# EAGLE board leddriverv3 (EAGLE 9.2.2)
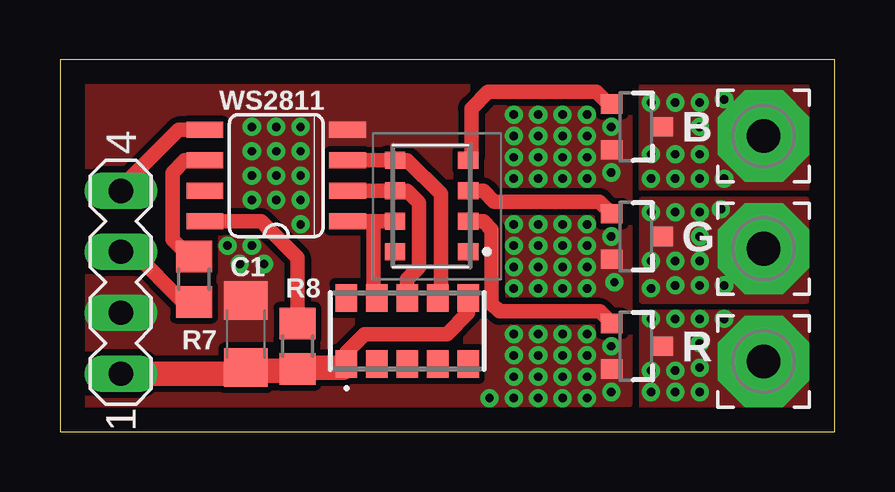
[diagram p0: board, top side]
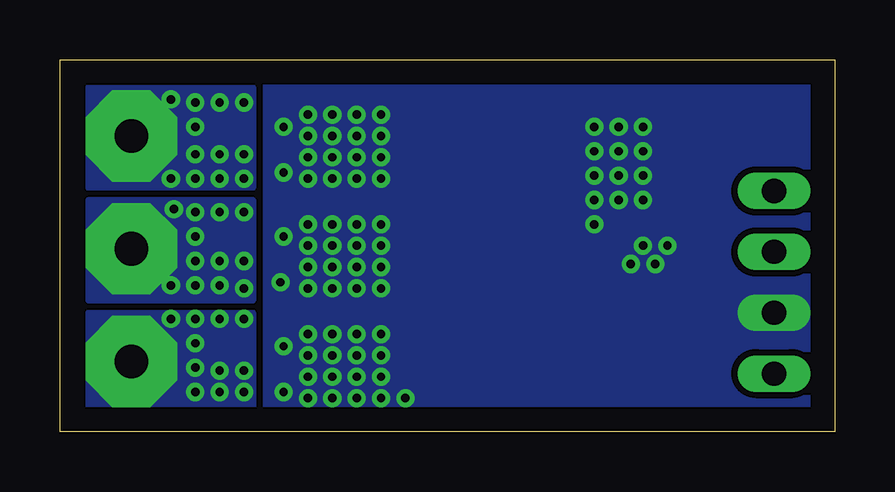
[diagram p1: board, bottom side, seen from below]

Size 32.31 x 15.48 mm. Coordinates in mm from the lower left corner, seen from the top.
Outline: 0,0 32.31,0 32.31,15.48 0,15.48 0,0
Copper layers (1*16): Top 0.035mm / dielectric 1.5mm / Bottom 0.035mm
Design rules "default *": minimum track width 6mil, minimum drill 0.35mm, track to track 6mil, track to pad 6mil, pad to pad 6mil, via to via 6mil, smd to smd 6mil, copper to edge 40mil, drill to drill 6mil, minimum pad ring 10mil, minimum via ring 8mil, stop-mask expansion 4mil, vias tented up to drill 100mil, thermal gap 10mil

## Footprints (pad centres in the part's own frame; a part is rotated, then mirrored left to right if it is on the bottom)
C1206 = smd 1.6 x 1.8: 1 -1.4,0; 2 1.4,0
SO08-SKINNYPADS = smd 0.66 x 1.524: 1 -1.905,-2.973; 2 -0.635,-2.973; 3 0.635,-2.973; 4 1.905,-2.973; 5 1.905,2.973; 6 0.635,2.973; 7 -0.635,2.973; 8 -1.905,2.973
3,81/1,4 = drill 1.397 pad 3.81 octagon: 1 0,0
R0805 = smd 1.3 x 1.5: 1 -0.95,0; 2 0.95,0
YC324JK07100RL = smd 0.71 x 0.85: 1 -1.905,-1.525; 2 -0.635,-1.525; 3 0.635,-1.525; 4 1.905,-1.525; 5 -1.905,1.525; 6 -0.635,1.525; 7 0.635,1.525; 8 1.905,1.525
YC358T = smd 0.9 x 1.15: 1 -2.54,-1.375; 2 -1.27,-1.375; 3 0,-1.375; 4 1.27,-1.375; 5 2.54,-1.375; 6 2.54,1.375; 7 1.27,1.375; 8 0,1.375; 9 -1.27,1.375; 10 -2.54,1.375
MA04-1 = drill 1.016 long: 1 -3.81,0; 2 -1.27,0; 3 1.27,0; 4 3.81,0
SOT23-3 = smd 0.8 x 0.9: 1 -0.95,-1; 2 0.95,-1; 3 0,1.1

## Placement (x,y rotation side)
C1  0.1uF  [C1206]  7.75,4.06 270 top
IC1  WS2811-SOP8  [SO08-SKINNYPADS]  9.02,10.67 90 top
PAD1  [3,81/1,4]  29.34,2.92 0 top
PAD2  [3,81/1,4]  29.34,7.62 0 top
PAD3  [3,81/1,4]  29.34,12.32 0 top
R7  2.7k  [R0805]  9.91,3.56 270 top
R8  33  [R0805]  5.59,6.35 270 top
RN1  YC324-JK-07100RL  [YC324JK07100RL]  15.49,9.4 90 top
RN2  YC358TJK-0710KL  [YC358T]  14.48,4.19 0 top
SV1  [MA04-1]  2.54,6.22 90 top
TB  5.8A/30V/35mΩ  [SOT23-3]  24,12.7 270 top
TG  5.8A/30V/35mΩ  [SOT23-3]  24,8.13 270 top
TR  5.8A/30V/35mΩ  [SOT23-3]  24,3.56 270 top

## Library data of the parts
C1 = rcl; SPICEPREFIX: C
IC1 = adafruit_wsled
PAD1-PAD3 = wirepad
R7 R8 = rcl; SPICEPREFIX: R
RN1 = SamacSys_Parts; DESCRIPTION: Resistor Networks & Arrays; HEIGHT: 0.6mm; MANUFACTURER_NAME: YAGEO (PHYCOMP); MANUFACTURER_PART_NUMBER: YC324-JK-07100RL; MOUSER_PART_NUMBER: 603-YC324-JK-07100RL; MOUSER_PRICE-STOCK: https://www.mouser.com/Search/Refine.aspx?Keyword=603-YC324-JK-07100RL
RN2 = SamacSys_Parts; DESCRIPTION: Resistor Networks & Arrays 10K 5% CONVEX SQUARE 8X1225; HEIGHT: mm; MANUFACTURER_NAME: YAGEO (PHYCOMP); MANUFACTURER_PART_NUMBER: YC358TJK-0710KL; MOUSER_PART_NUMBER: 603-YC358TJK-0710KL; MOUSER_PRICE-STOCK: https://www.mouser.com/Search/Refine.aspx?Keyword=603-YC358TJK-0710KL
SV1 = con-lstb; OC_FARNELL: unknown; OC_NEWARK: unknown
TB TG TR = SparkFun-DiscreteSemi; PROD_ID: TRANS-12988

## Nets
+12V: C1.2 R7.2 RN2.1 RN2.6 SV1.1
B: IC1.3 RN1.8 RN2.7
BT: RN1.4 TB.1
DIN: R8.2 SV1.3
DOUT: IC1.5 SV1.4
G: IC1.2 RN1.7 RN2.8
GND: C1.1 IC1.4 SV1.2 TB.2 TG.2 TR.2
GT: RN1.3 TG.1
N$1: IC1.6 R8.1
NEG_B: PAD3.1 TB.3
NEG_G: PAD2.1 TG.3
NEG_R: PAD1.1 TR.3
R: IC1.1 RN1.6 RN2.9
RT: RN1.2 TR.1
VDD: IC1.8 R7.1

## Tracks (layer width: path | path; a pad name or v marks a point on that pad's centre or on a via)
+12V
  Top 0.61: RN2.6 17.02,4.95 16.13,4.06 12.7,4.06 11.94,3.3 RN2.1 11.94,2.79 11.81,2.67
  Top 1.016: SV1.1 7.5,2.41 C1.2 7.87,2.54 9.84,2.54 R7.2 9.97,2.67 11.81,2.67
B
  Top 0.406: 12.32,11.3 IC1.3
  Top 0.61: IC1.3 RN1.8 14.48,11.3 15.88,9.91 15.88,5.69 RN2.7
BT
  Top 0.61: TB.1 22.88,13.65 22.37,14.16 17.84,14.16 17.15,13.46 17.15,11.43 RN1.4
DIN
  Top 0.61: SV1.3 3.05,7.49 5.14,5.4 R8.2
DOUT
  Top 0.61: IC1.5 4.95,12.57 2.54,10.16 SV1.4
G
  Top 0.406: 12.07,10.03 IC1.2
  Top 0.61: IC1.2 RN1.7 14.48,10.03 14.98,9.53 14.98,6.85 14.48,6.35 RN2.8
GND  (via drill 0.35)
  other vias: 19.94,13.21 20.96,13.21 21.97,13.21 19.94,12.32 19.94,11.43 20.96,11.43 20.96,12.32 21.97,11.43 22.99,10.79 22.99,12.7 20.96,2.29 20.96,1.4 21.97,2.29 21.97,3.17 19.94,8.64 20.96,8.64 20.96,7.75 22.99,8.13 21.97,7.75 23.11,6.22 22.99,3.56 21.97,8.64 21.97,12.32 17.91,1.4 21.97,1.4 6.99,7.75 8,7.75 8.51,6.98 8,12.7 9.02,12.7 10.03,12.7 10.03,11.68 9.02,11.68 8,11.68 19.94,7.75 18.92,7.75 18.92,8.64 18.92,6.86 19.94,6.86 20.96,6.86 21.97,6.86 18.92,5.97 19.94,5.97 20.96,5.97 21.97,5.97 21.97,10.54 18.92,13.21 20.96,10.54 19.94,10.54 18.92,12.32 18.92,11.43 18.92,10.54 19.94,1.4 19.94,2.29 18.92,2.29 18.92,1.4 20.96,3.17 19.94,3.17 18.92,3.17 21.97,4.06 20.96,4.06 19.94,4.06 18.92,4.06 22.99,1.65 10.03,10.67 9.02,10.67 8,10.67 8,9.65 9.02,9.65 10.03,9.65 10.03,8.64 7.49,6.98
  pour Top (isolate 0.254, no thermals): 0.25,15.11 18.41,15.11 18.41,0.25 0.25,0.25
  pour Bottom (isolate 0.254, no thermals): 0.38,14.99 0.38,0.51 23.62,0.51 23.62,14.99
  pour Top (isolate 0.254, no thermals): 17.91,13.46 23.75,13.46 23.75,9.65 17.91,9.65
  pour Top (isolate 0.254, no thermals): 18.29,9.02 23.75,9.02 23.75,5.08 18.29,5.08
  pour Top (isolate 0.254, no thermals): 17.91,4.95 23.75,4.95 23.75,1.14 17.91,1.14
GT
  Top 0.61: 22.94,9.02 TG.1 22.5,9.59 18.1,9.59 17.65,10.03 RN1.3
N$1
  Top 0.61: IC1.6 5.21,11.3 4.7,10.79 4.7,8 5.4,7.3 R8.1
NEG_B  (via drill 0.35)
  other vias: 24.64,13.72 25.65,13.72 26.67,13.72 26.67,12.7 26.67,11.56 25.65,11.56 24.64,11.56 25.65,10.54 24.64,10.54 26.67,10.54 27.69,10.54 27.69,13.84
  pour Top (no thermals): 31.12,10.16 24.26,10.16 24.26,14.35 31.12,14.35
  pour Bottom (no thermals): 24.26,14.35 24.26,10.16 31.12,10.16 31.12,14.35
NEG_G  (via drill 0.35)
  other vias: 24.64,9.14 25.65,9.14 26.67,9.14 26.67,8.13 26.67,7.11 25.65,7.11 24.64,7.11 27.56,9.27 27.69,6.1 24.64,5.97 25.65,6.1 26.67,6.1
  pour Top (no thermals): 31.12,9.65 24.26,9.65 24.26,5.46 31.12,5.46
  pour Bottom (no thermals): 24.26,9.65 24.26,5.46 31.12,5.46 31.12,9.65
NEG_R  (via drill 0.35)
  other vias: 24.64,2.54 25.65,2.54 26.67,3.68 26.67,2.67 26.67,1.65 25.65,1.65 24.64,1.65 24.64,4.7 25.65,4.7 26.67,4.7 27.69,4.7
  pour Top (no thermals): 31.12,4.95 24.26,4.95 24.26,1.02 31.12,1.02
  pour Bottom (no thermals): 24.26,4.95 24.26,1.02 31.12,1.02 31.12,4.95
R
  Top 0.406: IC1.1 12.37,8.76
  Top 0.61: RN1.6 13.08,8.76 | 13.08,8.76 IC1.1 | 13.08,8.76 13.08,5.69 RN2.9
RT
  Top 0.61: TR.1 22.5,5.01 18.32,5.01 18,5.33 18,8.42 17.65,8.76 RN1.2
VDD
  Top 0.61: IC1.8 8.38,8.76 9.91,7.24 R7.1

## Text on the board
tNames: WS2811 | B | G | C1 | R8 | R7 | R